# Altium PCB ESP12E-v2.PcbDoc
Units mil, origin at the board's own origin, x right, y up, seen from the top; angles counter-clockwise.
Board outline 984.25 x 1968.5 mil, 2 copper layers (Top Layer, Bottom Layer); 23 components, 26 nets, 148 pads, 44 vias.
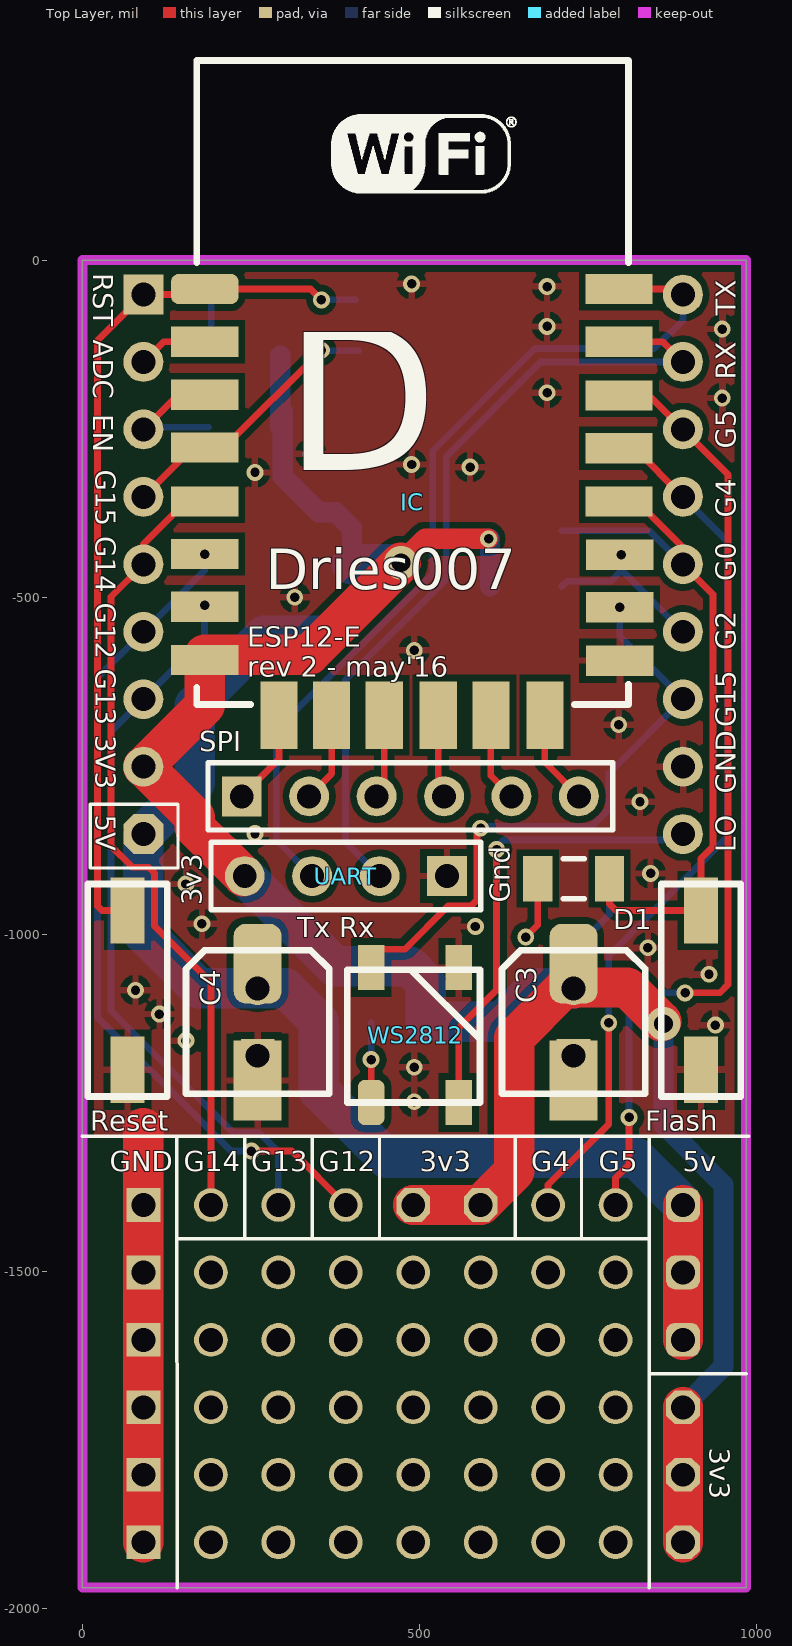
[diagram p0: Top Layer view]
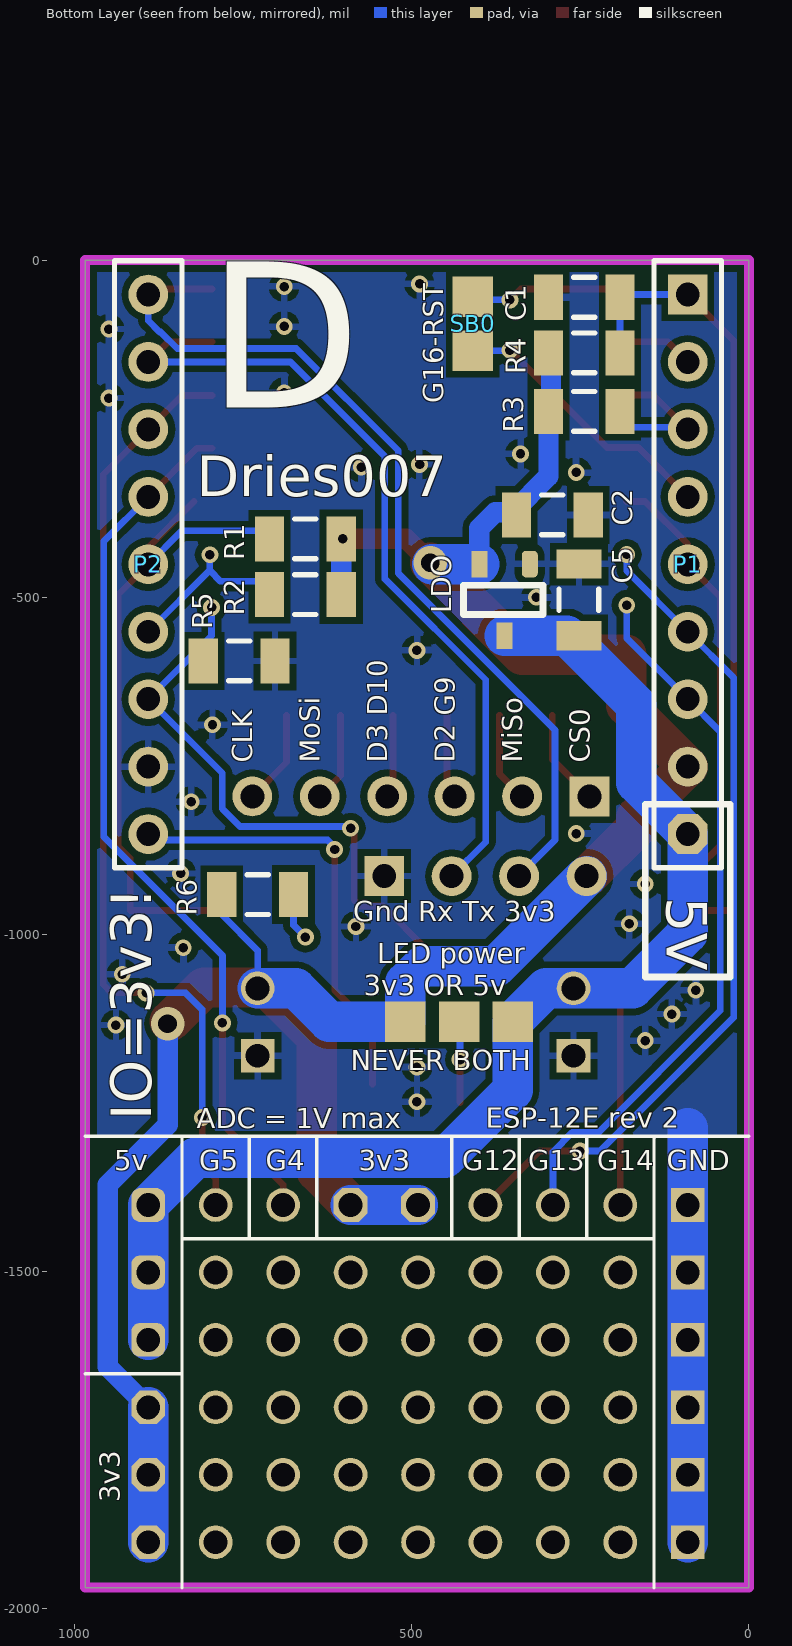
[diagram p1: Bottom Layer view, seen from below]

## Layer stack, top to bottom
Top Solder: solder mask 0.4, Solder Resist, Dk 3.5
Top Layer: signal copper 1.4
Dielectric 1: dielectric 12.6, FR-4, Dk 4.8
Bottom Layer: signal copper 1.4
Bottom Solder: solder mask 0.4, Solder Resist, Dk 3.5

## Board outline
0,-1968.5 984.25,-1968.5 984.25,0 0,0

## Design rules (kind name [scope] priority, off if disabled: settings)
Clearance [All] p1: gap=10
PolygonConnect [All] p1: connectstyle=Relief reliefconductorwidth=10 reliefentries=4 polygonreliefangle="90 Angle" airgapwidth=10
RoutingVias [All] p1: holewidth=28 width=50 viastyle="Through Hole" minholewidth=14 minwidth=25 maxholewidth=28 maxwidth=50
SolderMaskExpansion [All] p1: expansion=4
Width [All] p1: maxlimit=60 minlimit=10 preferedwidth=10 minimp=50.000000 maximp=50.000000 favimp=50.000000
30 further rules are at their usual default settings.

## Components (designator, comment, footprint, x,y, rotation, side; value= is the part's Value field where it differs from the comment)
"3v3 OR 5v" "SolderSelector" SolderSelector 429.13,-1129.53 r0 bottom (schematic designator 3v3-5v)
C1 "Cap Semi" C1206 244.09,-55.12 r0 bottom
C2 "Cap Semi" C1206 291.34,-377.95 r180 bottom
C3 "" "SMD cap 6x5" 728.35,-1129.92 r270 top
C4 "" "SMD cap 6x5" 259.84,-1129.92 r270 top
C5 "" C1206 251.97,-503.94 r270 bottom
D1 "FLASH LED" C1206 728.35,-917.32 r180 top
Flash "Flash" SMDswitch 917.32,-1082.68 r90 top
IC "ESP8266 ESP-12-E" "ESP8266 ESP-12-E" 834.65,-688.98 r0 top locked
LDO "3v3" SOT-23A 362.2,-503.94 r0 bottom (schematic designator IC1)
P1 "Header L" HDR1X9#1 90.55,-51.18 r270 bottom locked
P2 "Header R" HDR1X9#2 890.55,-51.18 r270 bottom locked
R1 "Res2" C1206 657.48,-413.39 r180 bottom
R2 "Res2" C1206 657.48,-496.06 r180 bottom
R3 "Res2" C1206 244.09,-224.41 r0 bottom
R4 "Res2" C1206 244.09,-137.8 r0 bottom
R5 "Res2" C1206 755.91,-594.49 r0 bottom
R6 "Res2" C1206 728.35,-940.94 r0 bottom
Reset "Reset" SMDswitch 66.93,-1082.68 r270 top
SB0 "G16-RST" SOLDERBRIDGE 409.45,-94.49 r270 bottom
SPI "Flash Q-SPI" HDR1X6 236.22,-795.28 r0 top
UART "Serial" HDR1X4 540.67,-913.39 r180 top
WS2812 "WS2812" WS2812B 488.19,-1149.21 r90 top

## Footprints (in the part's own frame and the unit in brackets; to place one, negate y for a bottom-side part, rotate by r counter-clockwise, add the part's x,y. Pads: shape width x height; smd on the part's side, far side on the other; paste and mask are expansions set on the pad)
C1206 [mm] "Chip Capacitor, Body 3.2x1.6mm, IPC High Density"
  rect 1.1x1.7 smd: 1(-1.35,0) 2(1.35,0)
  silkscreen extent -0.4,-0.75 0.4,0.75, body extent -1.7,-0.9 1.7,0.9, height 1.3
"ESP8266 ESP-12-E" [mil] "ESP8266 ESP-12-E"
  rrect50% 100x45 smd: 1(-653,646)
  rect 100x45 smd: 2(-653,568) 3(-653,489) 4(-653,411) 5(-653,331) 6(-653,253) 7(-653,175) 8(-653,96) 15(-38,95) 16(-38,174) 17(-38,252) 18(-39,331) 19(-39,410) 20(-39,488) 21(-39,568) 22(-39,646)
  rect 55x100 smd: 9(-543,14) 10(-465,14) 11(-387,14) 12(-307,14) 13(-229,14) 14(-149,14)
  silkscreen extent -665,30 -25,985
HDR1X4 [mm] "Connector; Header; 4 Position"
  rect 1.5x1.5 hole 0.9: 1(0,0)
  round 1.5 hole 0.9: 2(2.54,0) 3(5.08,0) 4(7.62,0)
  silkscreen extent -1.27,-1.27 8.89,1.27
HDR1X6 [mm] "Connector; Header; 6 Position"
  rect 1.5x1.5 hole 0.9: 1(0,0)
  round 1.5 hole 0.9: 2(2.54,0) 3(5.08,0) 4(7.62,0) 5(10.16,0) 6(12.7,0)
  silkscreen extent -1.27,-1.27 13.97,1.27
HDR1X9#1 [mm] "Connector; Header; 9 Position"
  rect 1.5x1.5 hole 0.9: 1(0,0)
  round 1.5 hole 0.9: 2(2.54,0) 3(5.08,0) 4(7.62,0) 5(10.16,0) 6(12.7,0) 7(15.24,0) 8(17.78,0)
  oct 1.5x1.5 hole 0.9: 9(20.32,0)
  silkscreen extent -1.27,-1.27 21.59,1.27
HDR1X9#2 [mm] "Connector; Header; 9 Position"
  round 1.5 hole 0.9: 1(0,0) 2(2.54,0) 3(5.08,0) 4(7.62,0) 5(10.16,0) 6(12.7,0) 7(15.24,0) 8(17.78,0) 9(20.32,0)
  silkscreen extent -1.27,-1.27 21.59,1.27
"SMD cap 6x5" [mm]
  rrect50% 3x1.8 smd: 1(-2.2,0)
  round 1.27 hole 0.9: 1(-1.27,0)
  rect 1.27x1.27 hole 0.9: 2(1.27,0)
  rect 3x1.8 smd: 2(2.2,0)
  silkscreen extent -2.7,-2.7 2.7,2.7
SMDswitch [mm]
  rect 2.5x1.27 smd: 1(3,0) 2(-3,0)
  silkscreen extent -4,-1.5 4,1.5
SOLDERBRIDGE [mil] "SolderBridge"
  rect 60x60 smd: 0(-40,0) 1(40,0)
SolderSelector [mil]
  rect 60x60 smd: 0(80,0) 1(-78.74,0) 2(0,0)
SOT-23A [mm]
  rrect50% 0.6x1 smd: 1(-0.95,-1.35)
  rect 0.6x1 smd: 2(0.95,-1.35) 3(0,1.35)
  silkscreen extent -1.45,-0.55 1.55,0.55
WS2812B [mm]
  rrect50% 1.7x1 smd: 1(-2.54,1.524)
  rect 1.7x1 smd: 2(-2.54,-1.778) 3(2.54,-1.778) 4(2.54,1.524)
  silkscreen extent -2.54,-2.58 2.46,2.42

## Part data
C1 C2: "Capacitor (Semiconductor SIM Model)"
C3 C4: library part "Cap Pol1", "Polarized Capacitor (Radial)"
C5: library part Cap, "Capacitor"
D1: library part LED2, "Typical RED, GREEN, YELLOW, AMBER GaAs LED"
Flash Reset: library part SW-PB, "Switch"
LDO: library part MCP1703, "Power regulator"
P1 P2: library part "Header 9", "Header, 9-Pin"
R1 R2 R3 R4 R5 R6: "Resistor"
SB0: library part SolderBridge
SPI: library part "Header 6", "Header, 6-Pin"
UART: library part "Header 4", "Header, 4-Pin"
WS2812: "Serial RGB Led"

## Free pads (board coordinates)
  rect 50x50 hole 35.43: 0(90.55,-1701.18) 0(90.55,-1401.18) 2(90.55,-1801.18) 2(90.55,-1501.18) 3(90.55,-1901.18) 3(90.55,-1601.18)
  round 50 hole 35.43: 7(290.55,-1401.18) 8(390.55,-1401.18) 12(190.55,-1501.18) 12(190.55,-1401.18) 12(390.55,-1501.18) 12(590.55,-1501.18) 12(790.55,-1501.18) 13(290.55,-1501.18) 13(490.55,-1501.18) 13(690.55,-1501.18) 14(190.55,-1601.18) 14(390.55,-1601.18) 14(590.55,-1601.18) 14(790.55,-1601.18) 15(290.55,-1601.18) 15(490.55,-1601.18) 15(690.55,-1601.18) 16(190.55,-1701.18) 16(390.55,-1701.18) 16(590.55,-1701.18) 16(790.55,-1701.18) 17(290.55,-1701.18) 17(490.55,-1701.18) 17(690.55,-1701.18) 18(190.55,-1801.18) 18(390.55,-1801.18) 18(590.55,-1801.18) 18(790.55,-1801.18) 19(290.55,-1801.18) 19(490.55,-1801.18) 19(690.55,-1801.18) 20(190.55,-1901.18) 20(390.55,-1901.18) 20(590.55,-1901.18) 20(790.55,-1901.18) 21(290.55,-1901.18) 21(490.55,-1901.18) 21(690.55,-1901.18) 22(790.55,-1401.18) 23(690.55,-1401.18)
  oct 50x50 hole 35.43: 9(490.55,-1401.18) 10(590.55,-1401.18) 17(890.55,-1701.18) 19(890.55,-1801.18) 21(890.55,-1901.18)
  rrect50% 50x50 hole 35.43: 11(890.55,-1401.18) 13(890.55,-1501.18) 15(890.55,-1601.18)

## Via types
v1: diameter 25, hole 14, Top Layer to Bottom Layer, tented both sides, 42 vias
v2: diameter 50, hole 28, Top Layer to Bottom Layer, tented both sides, 2 vias

## Nets (pads, with @x,y where several pads share a name; then routed paths per layer and width w, separated by ;. In a path a pad name is that pad's centre, name@x,y a point inside that pad or via, vN(x,y) a via of type N, cw(c..) or ccw(c..) an arc to the next point about the centre after c; other vN are vias at no path point)
5V: "3v3 OR 5v.1" C4.1 C5.2 LDO.3 P1.9 pad.11 pad.13@890.55,-1501.18 pad.15@890.55,-1601.18 | length 2034.1
  Top Layer w60: pad.15@890.55,-1601.18 890.55,-1501.18 pad.11
  Bottom Layer w60: LDO.3 269.68,-557.09 166.69,-660.08 166.69,-775.04 P1.9 90.55,-998.03 172.44,-1079.92 259.84,-1079.92 300.79,-1079.92 350.39,-1129.53 350.39,-1231.02 450.55,-1331.18 820.55,-1331.18 pad.11 890.55,-1501.18 pad.15@890.55,-1601.18
ADC: IC.2 P1.2 | length 103.6
  Top Layer w10: P1.2 120.76,-120.98 IC.2
CS0: IC.9 SPI.1 | length 143.3
  Top Layer w10: SPI.1 291.65,-739.85 IC.9
D2/G9: IC.11 SPI.3 | length 125
  Top Layer w10: SPI.3 447.65,-783.85 IC.11
D3/G10: IC.12 SPI.4 | length 123.9
  Top Layer w10: IC.12 527.65,-786.7 SPI.4
EN: IC.3 P1.3 R3.1 | length 205.6
  Top Layer w10: P1.3 141.76,-199.98 IC.3
  Bottom Layer w10: P1.3@93.7,-248.03 R3.1@187.01,-248.03
G0: D1.1 Flash.1 IC.18 P2.5 R1.1 | length 1038.3
  Top Layer w10: D1.1 781.5,-954.72 791.34,-964.57 Flash.1 917.32,-887.38 935.08,-869.62 935.08,-495.71 P2.5 890.55,-425.98 IC.18@822.54,-357.98
  Bottom Layer w10: R1.1@710.63,-401.57 840.94,-401.57 P2.5
G1/TX: IC.22 P2.1 UART.3 | length 1325
  Top Layer w10: IC.22 P2.1@882.35,-42.98
  Bottom Layer w10: UART.3 287.4,-860.12 287.4,-696.85 519.68,-464.57 519.68,-282.74 671.24,-131.18 847.58,-131.18 872.11,-106.65 873.66,-106.65 890.55,-89.76 P2.1
G2: IC.17 P2.6 R2.1 | length 274
  Bottom Layer w10: R2.1@710.63,-484.25 718.5,-476.38 783.46,-476.38 799.21,-460.63 v1(799.21,-437.01) 799.21,-459.84 P2.6
G3/RX: IC.21 P2.2 UART.2 | length 1221.5
  Top Layer w10: IC.21 860.35,-120.98 P2.2
  Bottom Layer w10: UART.2 390.13,-862.84 390.13,-622.41 539.68,-472.85 539.68,-291.02 679.53,-151.18 P2.2
G4: IC.19 P2.4 pad.23 | length 1312.4
  Top Layer w10: pad.23 690.55,-1371.18 780.55,-1281.18 v1(780.55,-1131.18) ; IC.19 818.35,-278.98 P2.4
  Bottom Layer w10: v1(780.55,-1131.18) 780.55,-1031.18 956.69,-855.04 956.69,-417.32 P2.4
G5: IC.20 P2.3 pad.22 | length 1426.9
  Top Layer w10: pad.22 790.55,-1361.18 810.55,-1341.18 v1(810.55,-1271.18) ; IC.20 840.35,-200.98 P2.3 957.32,-317.95 957.32,-1074.41 945.12,-1086.61 v1(893.7,-1086.61)
  Bottom Layer w10: v1(810.55,-1271.18) 810.55,-1111.18 835.12,-1086.61 v1(893.7,-1086.61)
G12: IC.6 P1.6 pad.8 | length 1235.5
  Top Layer w10: v1(250.55,-1321.18) 310.55,-1321.18 pad.8
  Bottom Layer w10: v1(181.1,-436.52) 181.1,-460.63 P1.6 22.5,-619.23 22.5,-1123.13 220.55,-1321.18 v1(250.55,-1321.18)
G13: IC.7 P1.7 pad.7 | length 1072.3
  Bottom Layer w10: v1(181.1,-511.81) 181.1,-560.63 P1.7 42.5,-699.23 42.5,-1113.13 223.05,-1293.68 261.94,-1293.68 290.55,-1322.29 pad.7
G14: IC.5 P1.5 pad.12@190.55,-1401.18 | length 1192.5
  Top Layer w10: IC.5 153.83,-357.98 90.55,-421.26 P1.5 42.5,-499.23 42.5,-868.63 74.22,-900.35 98.14,-900.35 106.93,-909.14 106.93,-987.56 190.55,-1071.18 190.55,-1350.07 pad.12@190.55,-1401.18
G15: IC.16 P2.7 R5.2 WS2812.4 | length 881.3
  Top Layer w10: WS2812.4@428.19,-1022.05 477.95,-1022.05 542.09,-957.91 576.41,-957.91 585.2,-949.13 585.2,-847.87 v1(590.55,-842.52)
  Bottom Layer w10: v1(590.55,-842.52) 593.27,-839.8 754.66,-839.8 780.75,-813.72 780.75,-760.98 P2.7 796.65,-557.28 v1(796.65,-514.98)
G16/W\A\K\E\: IC.4 P1.4 SB0.1 | length 409.2
  Top Layer w10: P1.4 163.76,-277.98 IC.4 210.21,-277.98 v1(354.33,-133.86)
  Bottom Layer w10: v1(354.33,-133.86) 354.96,-134.49 SB0.1
GND: C1.2 C2.2 C3.2 C4.2 C5.1 Flash.2 IC.15 LDO.1 P2.8 pad.0 pad.2 pad.3 R5.1 Reset.1 UART.1 WS2812.3 | length 1227.6
  Top Layer w60: pad.3@90.55,-1901.18 90.55,-1801.18 90.55,-1701.18 90.55,-1601.18 90.55,-1501.18 90.55,-1401.18 90.55,-1287.4
  Bottom Layer w60: pad.3@90.55,-1901.18 90.55,-1801.18 90.55,-1701.18 90.55,-1601.18 90.55,-1501.18 90.55,-1401.18 90.55,-1287.4
  other v1: 492.13,-1248.03 492.13,-1196.85 153.54,-1157.48 938.52,-1134.37 114.17,-1118.11 78.74,-1082.68 929.13,-1059.06 838.58,-1019.69 582.68,-988.19 177.17,-984.25 153.54,-925.2 842.52,-909.45 255.91,-850.39 826.77,-803.15 795.28,-688.98 492.13,-578.74 314.96,-500 255.91,-314.96 574.8,-307.09 488.19,-303.15 338.58,-287.4 948.82,-204.72 688.98,-196.85 948.82,-102.36 688.98,-98.43 688.98,-39.37 488.19,-35.43
MISO: IC.10 SPI.2 | length 134.1
  Top Layer w10: SPI.2 369.65,-761.85 IC.10
MOSI: IC.13 SPI.5 | length 133
  Top Layer w10: IC.13 605.65,-764.7 SPI.5
Net3v3-5v_2: "3v3 OR 5v.2" WS2812.1 | length 118.7
  Top Layer w10: WS2812.1 v1(428.19,-1185.59)
  Bottom Layer w10: v1(428.19,-1185.59) 428.19,-1130.47
NetD1_2: D1.2 R6.1 | length 164.3
  Top Layer w10: v1(657.48,-1003.94) 675.2,-986.22 D1.2
  Bottom Layer w10: v1(657.48,-1003.94) 675.2,-986.22 R6.1
NetP2_9: P2.9 WS2812.2 | length 664.4
  Top Layer w10: WS2812.2@558.19,-1222.05 558.19,-1138.27 614.17,-1082.28 v1(614.17,-874.01)
  Bottom Layer w10: v1(614.17,-874.01) 614.17,-870.08 624.45,-859.8 890.55,-859.8 P2.9
R\S\T\: C1.1 IC.1 P1.1 R4.1 Reset.2 SB0.0 | length 1474.2
  Top Layer w10: Reset.2 28.94,-964.57 22.5,-958.13 22.5,-119.23 P1.1 IC.1@173.44,-51.18 ; IC.1 338.25,-42.98 v1(354.33,-59.06)
  Bottom Layer w10: P1.1 C1.1@187.01,-51.18 ; R4.1 C1.1 ; v1(354.33,-59.06) SB0.0@404.88,-59.06
SCLK: IC.14 SPI.6 | length 141.2
  Top Layer w10: IC.14 685.65,-744.7 SPI.6
VDD: "3v3 OR 5v.0" C2.1 C3.1 IC.8 LDO.2 P1.8 pad.9 pad.10 pad.17@890.55,-1701.18 pad.19@890.55,-1801.18 pad.21@890.55,-1901.18 R1.2 R2.2 R3.2 R4.2 R6.2 UART.4 | length 4034.5
  Top Layer w30: v2(472.44,-448.82) 507.87,-413.39 v1(602.36,-413.39)
  Top Layer w60: UART.4@238.71,-913.39 166.69,-841.37 166.69,-826.46 91.41,-751.18 P1.8 181.65,-660.09 IC.8 181.65,-584.98 336.28,-584.98 v2(472.44,-448.82) ; pad.9 pad.10 640.55,-1351.18 640.55,-1153.27 713.9,-1079.92 728.35,-1079.92 728.35,-1078.68 808.05,-1078.68 v2@858.35,-1128.98 ; pad.21@890.55,-1901.18 890.55,-1801.18 pad.17@890.55,-1701.18
  Bottom Layer w10: C3.1@728.35,-1079.92 728.35,-1023.62 781.5,-970.47 R6.2@781.5,-917.32
  Bottom Layer w30: R3.2@293.31,-248.03 R4.2@293.31,-141.73 ; R3.2 297.24,-320.87 350.39,-374.02 375.98,-374.02 399.61,-397.64 LDO.2 ; v1(602.36,-413.39) R1.2 ; R2.2@604.33,-484.25 R1.2@604.33,-417.32 ; v2(861.76,-1132.39) 861.76,-1282.39 950.55,-1371.18 950.55,-1641.18 pad.17@890.55,-1701.18
  Bottom Layer w60: UART.4 374.13,-1046.85 484.25,-1046.85 509.13,-1071.73 509.13,-1129.53 622.05,-1129.53 671.65,-1079.92 C3.1@728.35,-1079.92 ; LDO.2 v2@469.82,-450.79 ; pad.9 pad.10 ; pad.21@890.55,-1901.18 890.55,-1801.18 pad.17@890.55,-1701.18

## Polygon pours and split planes (outlines as drawn)
GND on Top Layer "Top Layer-Gnd" (solid, remove dead copper, pour order 0): 0,0 0,-1298.82 984.25,-1298.82 984.25,0
GND on Bottom Layer "Top Layer-Gnd" (solid, remove dead copper, pour order 2): 0,-1298.82 984.25,-1298.82 984.25,0 0,0

## Keep-outs
Keep-Out Layer:
  the board outline again, w15

## Silkscreen, mask and mechanical layers (free items; w line width, h text height)
Top Overlay:
  lines w5: 0,-1299.21 988.19,-1299.21 ; 139.98,-1301.18 140.55,-1968.5 ; 140.55,-1451.18 641.73,-1451.18 ; 240.55,-1451.18 240.55,-1301.18 ; 340.55,-1451.18 340.55,-1299.21 ; 440.55,-1451.18 440.55,-1301.18 ; 641.73,-1298.82 641.73,-1451.18 ; 740.16,-1299.21 740.16,-1451.18 ; 840.55,-1968.5 840.55,-1651.18 ; 840.55,-1451.18 740.16,-1451.18 ; 840.55,-1301.18 840.55,-1651.18 ; 984.25,-1651.18 840.55,-1651.18 ; 641.73,-1451.18 740.16,-1451.18 ; 11.81,-901.57 141.73,-901.57 141.73,-807.09 11.81,-807.09 11.81,-901.57
  text "RST" at 15.75,-19.68 h30 r270
  text "TX" at 968.5,-82.68 h30 r90
  text "ADC" at 15.75,-118.11 h30 r270
  text "RX" at 968.5,-177.17 h30 r90
  text "EN" at 15.75,-228.35 h30 r270
  text "G5" at 968.5,-279.53 h30 r90
  text "G15" at 19.68,-311.02 h30 r270
  text "G4" at 968.5,-381.89 h30 r90
  text "G14" at 19.68,-409.45 h30 r270
  text "D" at 299.21,-425.2 h600
  text "G0" at 968.5,-476.38 h30 r90
  text "Dries007" at 271.65,-488.19 h60
  text "G12" at 19.68,-507.87 h30 r270
  text "G2" at 968.5,-578.74 h30 r90
  text "G13" at 19.68,-606.3 h30 r270
  text "ESP12-E / rev 2 - may'16" at 244.09,-618.11 h30
  text "G15" at 968.5,-692.91 h30 r90
  text "3V3" at 19.68,-704.72 h30 r270
  text "GND" at 968.5,-791.34 h30 r90
  text "5V" at 19.68,-822.83 h30 r270
  text "LO" at 968.5,-877.95 h30 r90
  text "Gnd" at 633.86,-952.76 h30 r90
  text "3v3" at 177.17,-956.69 h30 r90
  text "Tx Rx" at 318.9,-1003.94 h30
  text "GND" at 40.55,-1351.18 h30
  text "G14" at 150.55,-1351.18 h30
  text "G13" at 250.55,-1351.18 h30
  text "G12" at 350.55,-1351.18 h30
  text "3v3" at 500.55,-1351.18 h30
  text "G4" at 665.55,-1351.18 h30
  text "G5" at 765.55,-1351.18 h30
  text "5v" at 890.55,-1351.18 h30
  text "3v3" at 930.55,-1761.18 h30 r270
Bottom Overlay:
  lines w5: 0,-1299.21 984.25,-1299.21 ; 138.58,-1299.21 140.55,-1301.18 140.55,-1968.5 ; 140.55,-1451.18 840.55,-1451.18 ; 240.55,-1451.18 240.55,-1301.18 ; 340.55,-1451.18 340.55,-1299.21 ; 440.55,-1451.18 440.55,-1301.18 ; 640.55,-1451.18 640.55,-1299.21 ; 740.55,-1451.18 740.55,-1301.18 ; 840.55,-1968.5 840.55,-1299.21 ; 840.55,-1651.18 984.25,-1651.18
  lines w10: 27.56,-1062.99 153.54,-1062.99 153.54,-807.09 27.56,-807.09 27.56,-1062.99
  text "D" at 803.15,-295.28 h400
  text "Dries007" at 818.9,-350.39 h60
  text "CS0" at 236.22,-745.28 h30 r270
  text "MiSo" at 336.22,-745.28 h30 r270
  text "D2 G9" at 436.22,-745.28 h30 r270
  text "D3 D10" at 536.22,-745.28 h30 r270
  text "MoSi" at 636.22,-745.28 h30 r270
  text "CLK" at 736.22,-745.28 h30 r270
  text "5V" at 122.05,-944.88 h60 r90
  text "Gnd Rx Tx 3v3" at 586.61,-980.32 h30
  text "LED power" at 551.18,-1042.91 h30
  text "NEVER BOTH" at 590.55,-1201.18 h30
  text "IO=3v3!" at 885.83,-1275.59 h60 r270
  text "ESP-12E rev 2" at 389.76,-1287.01 h30
  text "ADC = 1V max" at 818.9,-1287.4 h30
  text "GND" at 122.05,-1350 h30
  text "G14" at 224.41,-1350 h30
  text "G13" at 326.77,-1350 h30
  text "G12" at 425.2,-1350 h30
  text "3v3" at 578.74,-1350 h30
  text "G4" at 716.54,-1350 h30
  text "G5" at 814.96,-1350 h30
  text "5v" at 940.94,-1350 h30
  text "3v3" at 933.07,-1842.13 h30 r270
Mechanical 1:
  the board outline again, w15